# Altium PCB HT62N.PcbDoc
Units mm, origin at the board's own origin, x right, y up, seen from the top; angles counter-clockwise.
Board outline 36 x 52.5 mm, 2 copper layers (Top Layer, Bottom Layer), stack 1.571 mm thick; 34 components, 32 nets, 160 pads, 165 vias.
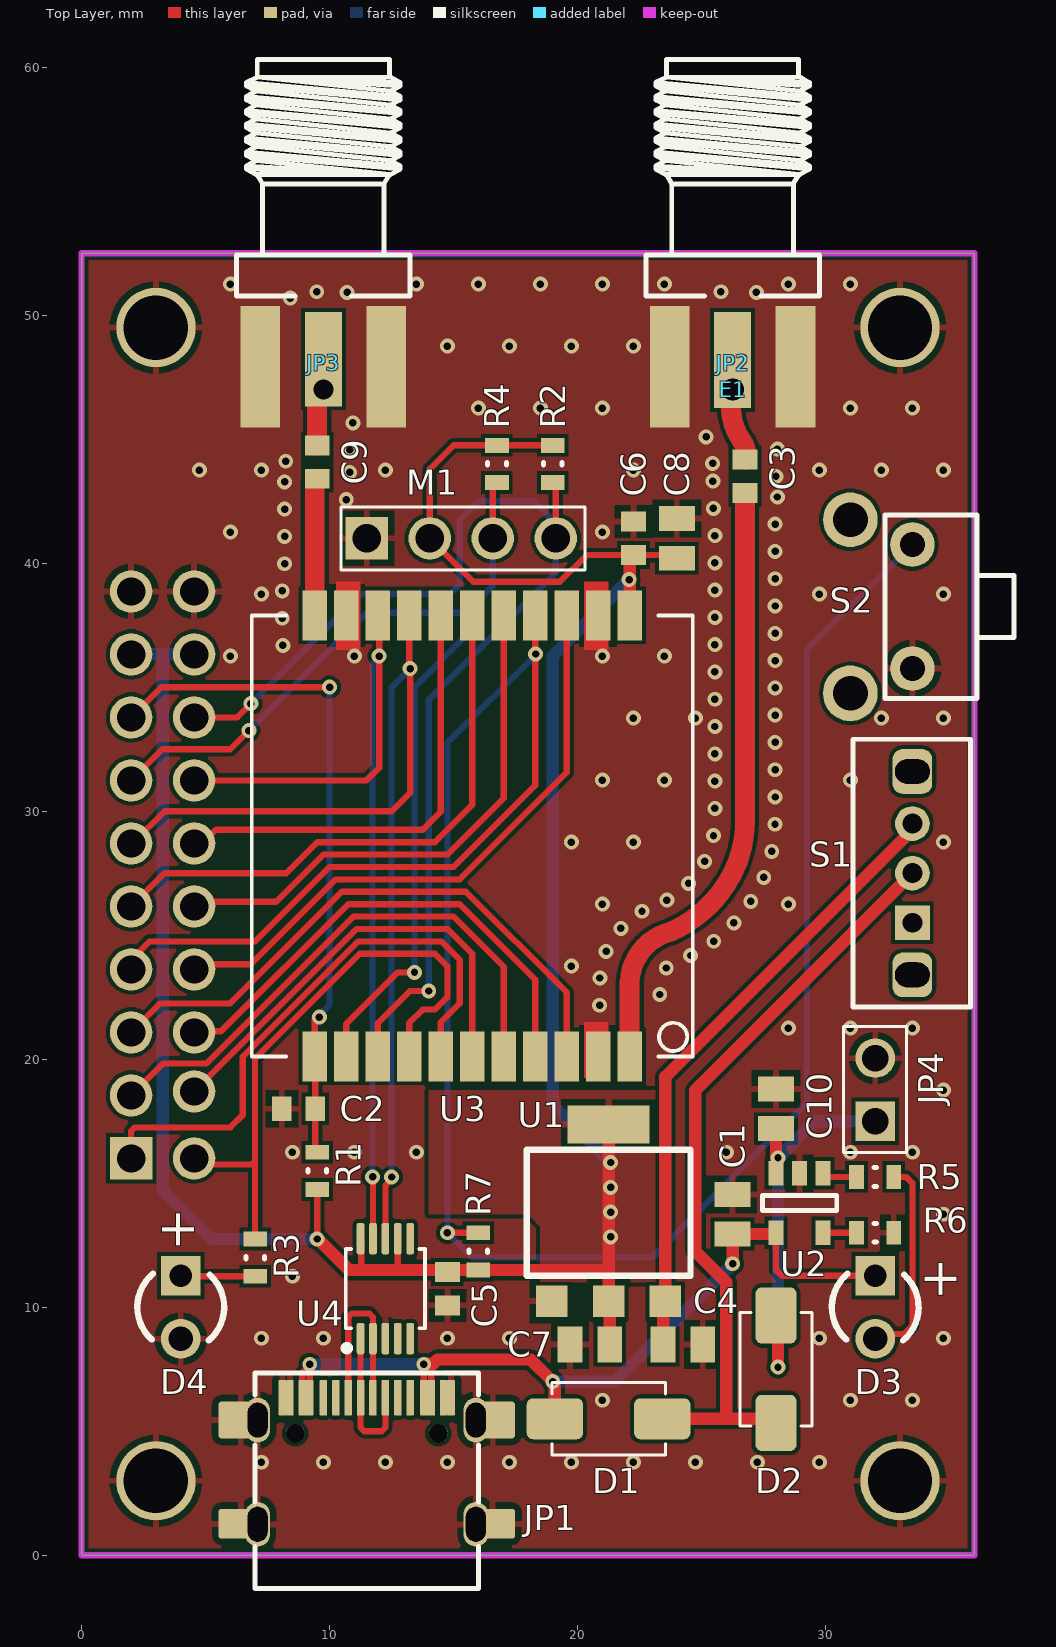
[diagram p0: Top Layer view]
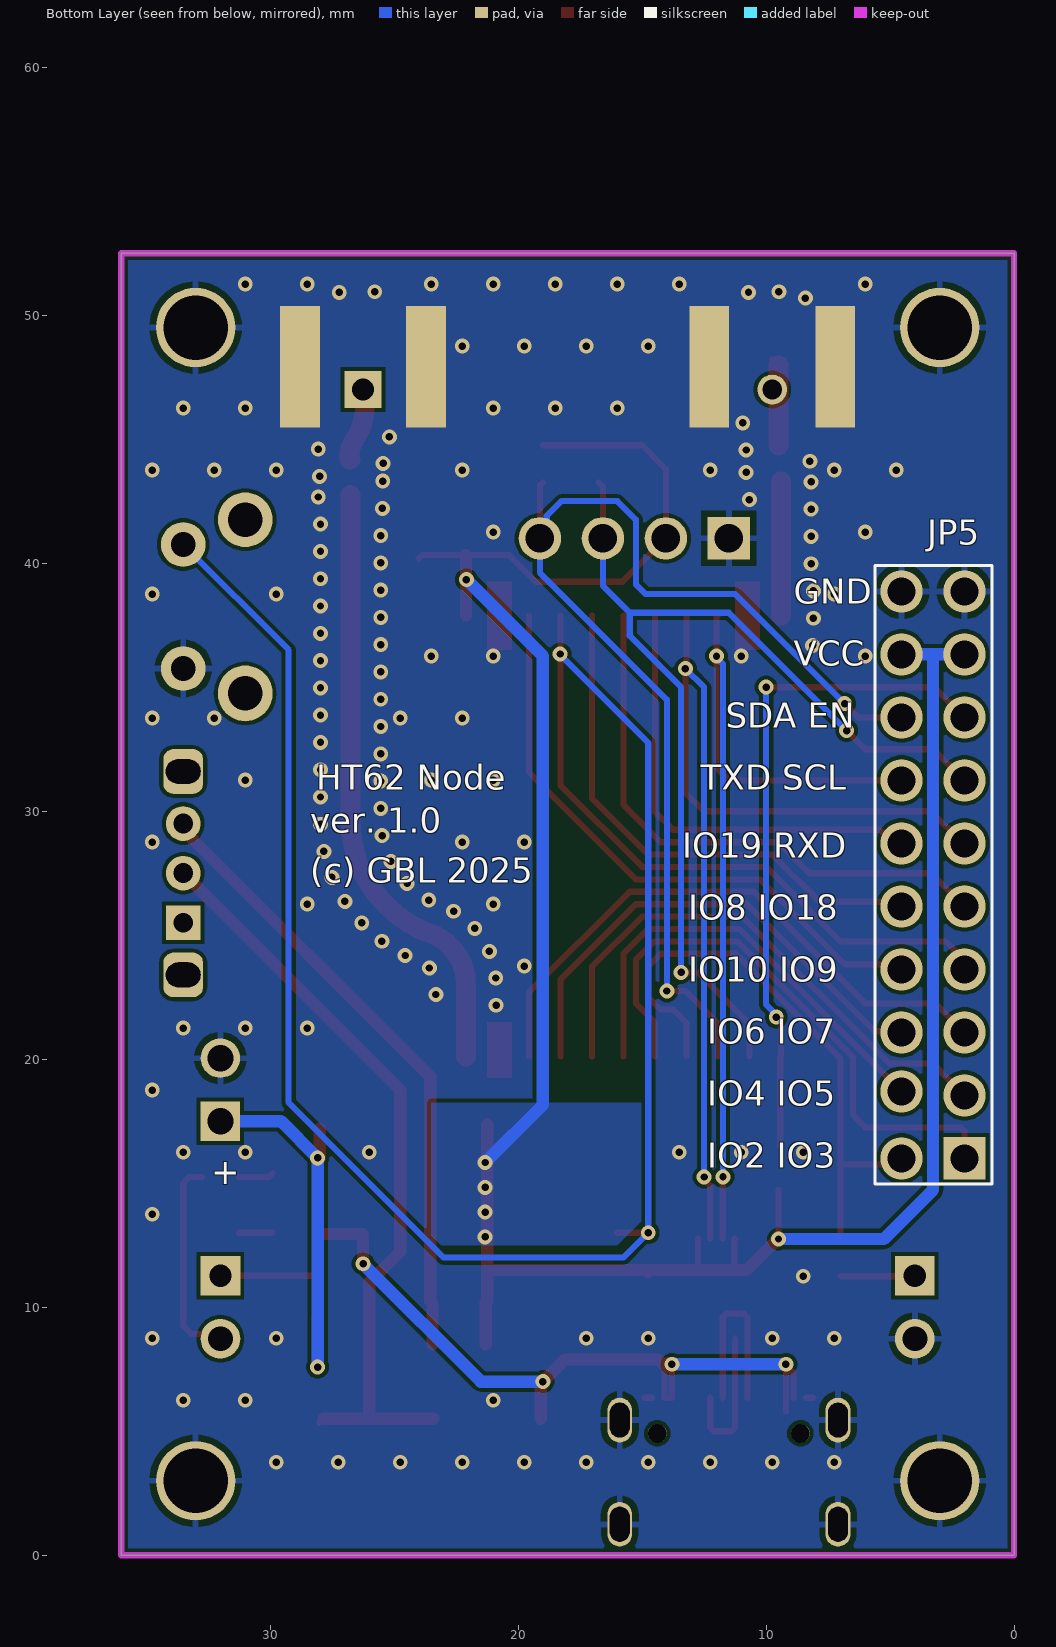
[diagram p1: Bottom Layer view, seen from below]
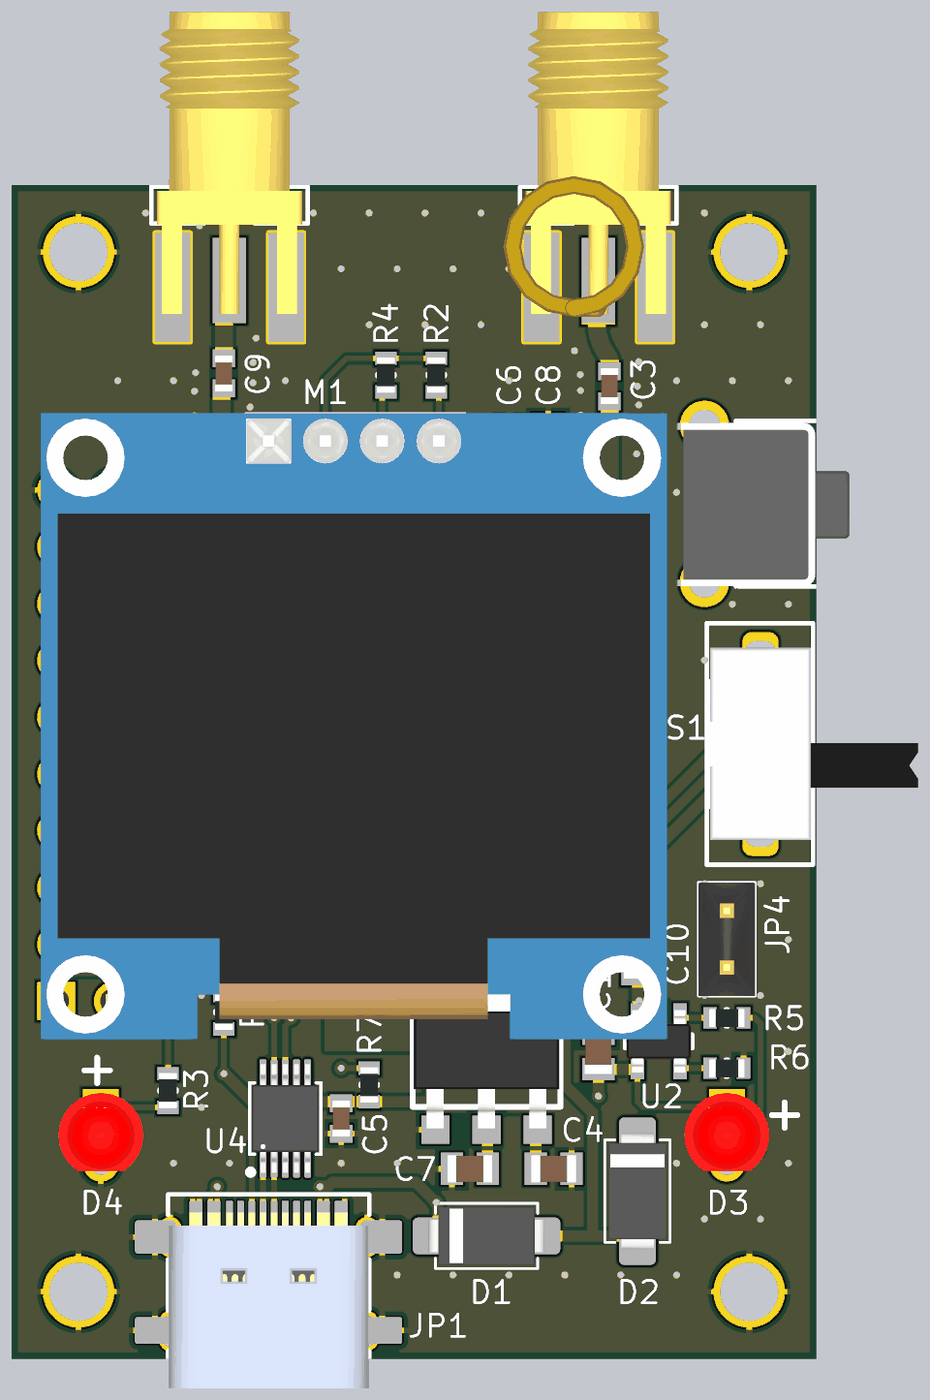
[diagram p2: 3D render of the assembled board from above, using the file's embedded part models]

## Layer stack, top to bottom
Top Solder: solder mask 0.0102, Solder Resist, Dk 3.5
Top Layer: signal copper 0.0356
Dielectric 1: dielectric 1.5, FR-4, Dk 4.8
Bottom Layer: signal copper 0.0356
Bottom Solder: solder mask 0.0102, Solder Resist, Dk 3.5

## Board outline
0,0 0,52.5 36,52.5 36,0

## Design rules (kind name [scope] priority, off if disabled: settings)
Clearance [All] p1: gap=0.15 ignorepadtopadclearanceinfootprint=FALSE
ComponentClearance ComponentClearance_1 [InComponent('JP2') vs InComponent('E1')] p1: gap=0 collisioncheckmode=3 verticalgap=0 showdistances=FALSE
ComponentClearance [All] p2: gap=0.2 collisioncheckmode=3 verticalgap=0.2 showdistances=FALSE
HoleSize [All] p1: absolutevalues=TRUE maxlimit=5 minlimit=0.25 maxpercent=80.000 minpercent=20.000
MinimumSolderMaskSliver [All] p1: minsoldermaskwidth=0.05
PlaneConnect [All] p1: pad.planeconnectstyle=Relief pad.reliefexpansion=0.5 pad.reliefentries=4 pad.reliefconductorwidth=0.25 pad.reliefairgap=0.25 via.planeconnectstyle=Direct via.reliefexpansion=0.508 via.reliefentries=4 via.reliefconductorwidth=0.254 via.reliefairgap=0.254
PolygonConnect PolygonConnect_4 [All vs IsNamedPolygon('VCC_L01_P000') Or IsNamedPolygon('VCC_L02_P001')] p1: thpad.connectstyle=Relief thpad.reliefconductorwidth=0.254 thpad.reliefentries=4 thpad.polygonreliefangle="90 Angle" thpad.airgapwidth=0.254 smdpad.connectstyle=Relief smdpad.reliefconductorwidth=0.254 smdpad.reliefentries=4 smdpad.polygonreliefangle="90 Angle" smdpad.airgapwidth=0.254 via.connectstyle=Direct via.reliefconductorwidth=0.254 via.reliefentries=4 via.polygonreliefangle="90 Angle" via.airgapwidth=0.254
PolygonConnect PolygonConnect_3 [InComponent('U1') vs IsNamedPolygon('VCC_L01_P000') Or IsNamedPolygon('VCC_L02_P001')] p2: connectstyle=Direct reliefconductorwidth=0.254 reliefentries=4 polygonreliefangle="90 Angle" airgapwidth=0.254
PolygonConnect PolygonConnect_2 [All vs InComponent('JP2') or InComponent('JP3')] p3: thpad.connectstyle=Relief thpad.reliefconductorwidth=0.254 thpad.reliefentries=4 thpad.polygonreliefangle="90 Angle" thpad.airgapwidth=0.254 smdpad.connectstyle=Direct smdpad.reliefconductorwidth=0.254 smdpad.reliefentries=4 smdpad.polygonreliefangle="90 Angle" smdpad.airgapwidth=0.254 via.connectstyle=Relief via.reliefconductorwidth=0.254 via.reliefentries=4 via.polygonreliefangle="90 Angle" via.airgapwidth=0.254
PolygonConnect PolygonConnect_1 [All vs IsNamedPolygon('GND_L01_P002') Or IsNamedPolygon('GND_L02_P003')] p4: thpad.connectstyle=Relief thpad.reliefconductorwidth=0.254 thpad.reliefentries=4 thpad.polygonreliefangle="90 Angle" thpad.airgapwidth=0.254 smdpad.connectstyle=Relief smdpad.reliefconductorwidth=0.254 smdpad.reliefentries=4 smdpad.polygonreliefangle="90 Angle" smdpad.airgapwidth=0.254 via.connectstyle=Direct via.reliefconductorwidth=0.254 via.reliefentries=4 via.polygonreliefangle="90 Angle" via.airgapwidth=0.254
PolygonConnect [All] p5: thpad.connectstyle=Relief thpad.reliefconductorwidth=0.25 thpad.reliefentries=4 thpad.polygonreliefangle="90 Angle" thpad.airgapwidth=0.25 smdpad.connectstyle=Relief smdpad.reliefconductorwidth=0.25 smdpad.reliefentries=4 smdpad.polygonreliefangle="90 Angle" smdpad.airgapwidth=0.25 via.connectstyle=Direct via.reliefconductorwidth=0.254 via.reliefentries=4 via.polygonreliefangle="90 Angle" via.airgapwidth=0.254
RoutingVias [All] p1: holewidth=0.711 width=1.27 viastyle="Through Hole" minholewidth=0.711 minwidth=1.27 maxholewidth=0.711 maxwidth=1.27
SilkToSilkClearance [All] p1: silktosilkclearance=0.05
SilkToSolderMaskClearance [IsPad] p1: minsilkscreentomaskgap=0.025 clearancetoexposedcopper=TRUE
SolderMaskExpansion SolderMaskExpansion_1 [IsVia] p1: expansion=0.102 istentingtop=TRUE useseparateexpansions=TRUE expansionbottom=0.102 istentingbottom=TRUE
SolderMaskExpansion [All] p2: expansion=0.1 istentingtop=FALSE
Width [All] p1: maxlimit=3 minlimit=0.15 preferedwidth=0.25
24 further rules are at their usual default settings.

## Components (designator, comment, footprint, x,y, rotation, side; value= is the part's Value field where it differs from the comment)
C1 "10uF" C-0805 26.25,13.75 r270 top
C2 "100nF" C-0603 8.75,18 r0 top
C3 "nc" C-0603 26.75,43.5 r270 top
C4 "10uF" C-0805 24.25,8.5 r0 top
C5 "100nF" C-0603 14.75,10.75 r90 top
C6 "100nF" C-0603 22.25,41 r270 top
C7 "10uF" C-0805 20.5,8.5 r180 top
C8 "10uF" C-0805 24,41 r90 top
C9 "100pF" C-0603 9.5,44.075 r90 top
C10 "10uF" C-0805 28,18 r270 top
D1 "DIODSH" D-SMA 21.25,5.5 r0 top
D2 "DIODSH" D-SMA 28,7.5 r270 top
D3 "DLED" LED_3mm_RED 32,10 r270 top
D4 "DLED" LED_3mm_RED 4,10 r270 top
E1 "SPRING868" ANT_H868_V 26.25,47 r270 top
JP1 "L-KLS1-5473" USB_C_SMD_SLOT 11.5,6.35 r0 top locked
JP2 "nc" SMA_F_EDGE 26.25,49.5 r270 top locked
JP3 "EM-SA071-GGT" SMA_F_EDGE 9.75,49.5 r270 top
JP4 "HEADER 2" PLS1-2 32,17.5 r90 top locked
JP5 "HEADER 10X2" PLS2_10 2,16 r90 bottom locked
M1 "OLED0_96" OLED096_I2C 11.5,41 r0 top locked
R1 "10k" R-0603 9.5,15.5 r90 top
R2 "10k" R-0603 19,44 r270 top
R3 "1k" R-0603 7,12 r90 top
R4 "10k" R-0603 16.75,44 r270 top
R5 "1k" R-0603 32,15.25 r0 top
R6 "4k7" R-0603 32,13 r180 top
R7 "10k" R-0603 16,12.25 r90 top
S1 "SW SPDT" SK-12D07VG5 33.5,27.5 r90 top
S2 "KLS7-TS3602 -3 15-180" KLS7-TS3602 33.5,38.25 r90 top
U1 "LDL1117" SOT223 21.25,13.806 r0 top
U2 "MCP73831-2ATI/OT" SOT-23-5 28.95,14.2 r270 top value={Value}
U3 "HT-CT62" HT-CT62 15.75,29 r90 top locked
U4 "CH340E" MSOP-10 12.25,10.75 r0 top value={Value}

## Footprints (in the part's own frame and the unit in brackets; to place one, negate y for a bottom-side part, rotate by r counter-clockwise, add the part's x,y. Pads: shape width x height; smd on the part's side, far side on the other; paste and mask are expansions set on the pad)
ANT_H868_V [mm] "helical 868 MHz antenna"
  rect 1.5x1.5 hole 0.9: 1(0,0)
  body extent -5.9,-4.25 0.4,2.05, height 15.4
C-0603 [mm] "Chip Capacitor, 2-Leads, Body 1,60x0,80mm, IPC Medium Density"
  rect 0.8x1 smd: 1(-0.675,0) 2(0.675,0)
  body extent -0.8,-0.4 0.8,0.4, height 0.8
C-0805 [mm] "Chip Capacitor, 2-Leads, Body 2,00x1,25mm, IPC Medium Density"
  rect 1x1.45 smd: 1(-0.8,0) 2(0.8,0)
  body extent -1,-0.62 1,0.63, height 1.25
D-SMA [mm] "Diode, Molded Body; 4.315 mm L X 2.605 mm W X 2.41 mm H body"
  rrect30% 2.27x1.65 smd: 1(-2.165,0) 2(2.165,0)
  silkscreen extent -2.29,-1.46 2.29,1.46, body extent -2.61,-1.3 2.61,1.3, height 2.41
HT-CT62 [mm]
  rect 2x1 smd: 1(-8.89,-6.35) 2(-8.89,-5.08) 3(-8.89,-3.81) 4(-8.89,-2.54) 5(-8.89,-1.27) 6(-8.89,0) 7(-8.89,1.27) 8(-8.89,2.54) 9(-8.89,3.81) 10(-8.89,5.08) 11(-8.89,6.35) 12(8.89,-6.35) 13(8.89,-5.08) 14(8.89,-3.81) 15(8.89,-2.54) 16(8.89,-1.27) 17(8.89,0) 18(8.89,1.27) 19(8.89,2.54) 20(8.89,3.81) 21(8.89,5.08) 22(8.89,6.35)
  silkscreen extent -8.89,-8.89 8.89,8.89, body extent -8.89,-8.89 8.89,8.89, height 2.8
KLS7-TS3602 [mm] "miniature switch"
  round 1.8 hole 1: 1(-2.5,0) 2(2.5,0)
  oval 2.25x2.2 hole 1.4: 3(-3.5,2.5)
  round 2.2 hole 1.4: 3(3.5,2.5)
  silkscreen extent -3.7,-4.1 3.7,1.1, body extent -3.7,-3.97 3.6,3.75, height 4.4
LED_3mm_RED [mm]
  rect 1.6x1.6 hole 0.9: 1(-1.27,0)
  round 1.6 hole 1: 2(1.27,0)
  silkscreen extent -1.34,-1.75 1.34,1.75, body extent -1.9,-1.9 1.6,1.9, height 5.75
MSOP-10 [mm] "Small Outline Pkg (SOP), 0.50 mm pitch; 10 pin, 3.00 mm L X 3.00 mm W X 1.10 mm H body"
  rrect52% 0.31x1.27 smd: 1(-1,-2.015) 2(-0.5,-2.015) 3(0,-2.015) 4(0.5,-2.015) 5(1,-2.015) 6(1,2.015) 7(0.5,2.015) 8(0,2.015) 9(-0.5,2.015) 10(-1,2.015)
  silkscreen extent -1.68,-2.52 1.6,1.6, body extent -1.5,-2.42 1.5,2.42, height 1.1
OLED096_I2C [mm] "Header, Vertical, 2.54 mm pitch; 0.70 mm lead width, 7 pins, 1 row, 7 pins per row, 16.51 mm L X 2.54 mm W X 7.54 mm H body"
  rect 1.71x1.71 hole 1.14 paste-1.71: 1(0,0)
  round 1.71 hole 1.14 paste-1.71: 2(2.54,0) 3(5.08,0) 4(7.62,0)
  silkscreen extent -1.04,-1.27 8.8,1.27, body extent -10.19,-26.7 17.81,1.3, height 7.08
PLS1-2 [mm] "Header, Vertical, 2.54 mm pitch; 0.64 mm lead width, 2 pins, 1 row, 2 pins per row, 5.08 mm L X 2.54 mm W X 8.54 mm H body"
  rect 1.59x1.59 hole 1.06 paste-1.59: 1(0,0)
  round 1.59 hole 1.06 paste-1.59: 2(2.54,0)
  silkscreen extent -1.27,-1.27 3.81,1.27, body extent -1.27,-1.27 3.81,1.27, height 8.54
PLS2_10 [mm] "Header, Vertical, 2.54 mm pitch; 0.70 mm lead width, 10 pins, 1 row, 10 pins per row, 24.13 mm L X 2.54 mm W X 7.54 mm H body"
  rect 1.71x1.71 hole 1.14 paste-1.71: 1(0,0)
  round 1.71 hole 1.14 paste-1.71: 2(0,2.54) 3(2.54,0) 4(2.7,2.54) 5(5.08,0) 6(5.08,2.54) 7(7.62,0) 8(7.62,2.54) 9(10.16,0) 10(10.16,2.54) 11(12.7,0) 12(12.7,2.54) 13(15.24,0) 14(15.24,2.54) 15(17.78,0) 16(17.78,2.54) 17(20.32,0) 18(20.32,2.54) 19(22.86,0) 20(22.86,2.54)
  silkscreen extent -1.04,-1.1 23.9,3.6, body extent -1.27,-1.27 24.13,3.81, height 8.54
R-0603 [mm] "Chip Resistor, 2-Leads, Body 1,60x0,82mm, IPC Medium Density"
  rect 0.6x0.95 smd: 1(-0.75,0) 2(0.75,0)
  silkscreen extent -0.05,-0.38 0.05,0.38, body extent -0.8,-0.4 0.8,0.4, height 0.45
SK-12D07VG5 [mm]
  rect 1.4x1.4 hole 0.8: 1(-2,0)
  round 1.4 hole 0.8: 2(0,0) 3(2,0)
  rrect50% 1.8x1.6 hole 1 slot 1.4 at 90 deg: S1(-4.1,0) S1(4.1,0)
  silkscreen extent -5.4,-2.35 5.4,2.4, body extent -4.3,-7.05 4.3,2.3, height 4.75
SMA_F_EDGE [mm] "SMA End Launch Jack for 1.58mm PCB, 50 Ohm, Flat Tab Contact"
  rect 3.81x1.5 smd: 1(1.27,0)
  rect 4.9x1.6 smd: 2(1.575,2.54) 2(1.575,-2.54)
  rect 4.9x1.6 smd far side: 2(1.575,2.54) 2(1.575,-2.54)
  silkscreen extent -10.81,-3.5 -1.28,3.5, body extent -10.73,-3.25 2.77,3.25, height 3.7
SOT223 [mil]
  rect 50x50 smd: 1(-90,-140) 2(0,-140) 3(90,-140)
  rect 130x60 smd: 4(0,140)
  silkscreen extent -130,-100 130,100, body extent -128,-138 128,138, height 67
SOT-23-5 [mm] "SOT23, 5-Leads, Body 2,90x2,45mm, Pitch 0,95mm, IPC Medium Density"
  rect 1x0.6 smd: 1(-1.2,0.95) 2(-1.2,0) 3(-1.2,-0.95) 4(1.2,-0.95) 5(1.2,0.95)
  silkscreen extent -0.3,-1.5 0.3,1.5, body extent -1.4,-1.45 1.4,1.45, height 1.55
USB_C_SMD_SLOT [mm] "USB 3.1 Type C"
  rrect20% 1.8x1.2 smd mask+0.07: 1(-5.08,-5.08) 1(5.08,-5.08)
  rrect20% 1.8x1.5 smd mask+0.07: 1(-5.08,-0.9) 1(5.08,-0.9)
  oval 1x1.8 hole 0.8 slot 1.4 at 90 deg: 1(-4.4,-5.1) 1(-4.4,-0.9) 1(4.4,-5.1) 1(4.4,-0.9)
  rrect30% 0.3x1.45 smd paste-2 mask+0.07: A1(-3.1,0) A4(-2.6,0) A9(2.6,0) A12(3.4,0) B1(3.1,0) B4(2.3,0) B9(-2.3,0) B12(-3.4,0)
  rrect30% 0.3x1.45 smd mask+0.07: A5(-1.25,0) A6(-0.25,0) A7(0.25,0) A8(1.25,0) B5(1.75,0) B6(0.75,0) B7(-0.75,0) B8(-1.75,0)
  round 0.75 hole 0.75 unplated paste-2 mask+0.07: MH(-2.885,-1.44) MH(2.885,-1.44)
  silkscreen extent -4.5,-7.69 4.5,1, body extent -4.47,-7.7 4.47,0.2, height 3.2

## Part data
C1 C2 C3 C4 C5 C6 C7 C8 C9 C10: library part CAPN, Voltage=50V, Вид=Конденсатор, Точність/група=NP0
E1: library part ANT, Вид=Антена, Примітки=Пряма
JP2 JP3: library part SMA, "SMA Female R/A PCB Mount", Вид=Роз'єм
M1: library part OLED0_96_I2C
R1 R2 R3 R4 R5 R6 R7: library part RES, Вид=Резистор, Точність/група=5%
S2: library part SW-1, Вид=Кнопка
U1: "LOW CURRENT ADJUSTABLE  VOLTAGE REGULATOR", Вид=Мікросхема
U2: Man#Part Num#=TPS61023DRLT, Manufacturer="Texas Instruments", Package=SOT-563, Temperature Range="-40°C ~ 125°C (TJ)", Component Type=SMD, Footprint Part=IC-package.PcbLib, IC Type=PMIC, Library Part=IC`s.SchLib, Mounting  Method=SMD, Part Number=MCP73831-2ATI/OT, Part Type=IC, Suplier 1=https://www.digikey.com.au/en/products/detail/texas-instruments/TPS61023DRLT/11310622?s=N4IgTCBcDaICoAUDKA2AjABjAZgCICUAZOEAXQF8g, URL=https://www.ti.com/general/docs/suppproductinfo.tsp?distId=10&gotoUrl=https%3A%2F%2Fwww.ti.com%2Flit%2Fgpn%2Ftps61023
D1 D2: Вид=Діод
D3 D4: Вид=Світлодіод
JP1 U4: Mounting  Method=SMD
JP4 JP5: Вид=Роз'єм
S1: Вид=Перемикач

## Free pads (board coordinates)
  round 3.2 hole 2.6: 1(3,3) 1(3,49.5) 1(33,3) 1(33,49.5)
  round 1.2 hole 0.8: 1(9.75,47)

## Via types
v1: diameter 0.6, hole 0.3, Top Layer to Bottom Layer, tented both sides, 165 vias

## Nets (pads, with @x,y where several pads share a name; then routed paths per layer and width w, separated by ;. In a path a pad name is that pad's centre, name@x,y a point inside that pad or via, vN(x,y) a via of type N, cw(c..) or ccw(c..) an arc to the next point about the centre after c; other vN are vias at no path point)
DN: JP1.A7 JP1.B7 U4.2 | length 7.6
  Top Layer w0.25: JP1.B7 10.75,9.604 10.896,9.75 11.604,9.75 11.75,9.604 U4.2 JP1.A7
DP: JP1.A6 JP1.B6 U4.1 | length 5.9
  Top Layer w0.25: U4.1 JP1.A6 11.25,5.146 11.396,5 12.104,5 12.25,5.146 JP1.B6
EN: C2.2 JP5.15 R1.2 U3.11 | length 27.3
  Top Layer w0.25: JP5.15 3.22,35 v1(10,35) ; R1.2@9.425,16.5 C2.2 9.425,20.085 U3.11 9.4,21.65 v1@9.5,21.75
  Bottom Layer w0.25: v1(9.59,21.694) 9.59,21.789 10,22.199 v1(10,35)
GND: C1.1 C2.1 C4.2 C5.1 C6.1 C7.2 C8.2 C10.1 D4.2 JP1.1 JP1.A1 JP1.A12 JP1.B1 JP1.B12 JP2.2 JP3.2 JP4.2 JP5.19 JP5.20 M1.1 pad.1@3,3 pad.1@3,49.5 pad.1@33,3 pad.1@33,49.5 R6.1 S2.1 U1.1 U2.2 U3.2 U3.13 U3.21 U4.3 | length 0.6
  Top Layer w0.25: JP1.B12 JP1.A1 ; JP1.B1 JP1.A12
  other v1: 7.25,3.75 9.75,3.75 12.25,3.75 14.75,3.75 17.25,3.75 19.75,3.75 22.25,3.75 24.75,3.75 27.25,3.75 29.75,3.75 21,6.25 31,6.25 33.5,6.25 7.25,8.75 9.75,8.75 14.75,8.75 17.25,8.75 29.75,8.75 34.75,8.75 8.5,11.25 34.75,13.75 8.5,16.25 11,16.25 13.5,16.25 26,16.25 31,16.25 33.5,16.25 34.75,18.75 28.5,21.25 31,21.25 33.5,21.25 20.885,22.174 23.315,22.608 20.9,23.274 23.574,23.677 19.75,23.75 24.552,24.179 21.153,24.345 25.489,24.756 21.744,25.273 26.304,25.494 22.598,25.965 21,26.25 28.5,26.25 26.984,26.36 23.602,26.416 24.473,27.087 27.507,27.327 25.125,27.973 27.829,28.379 19.75,28.75 22.25,28.75 34.75,28.75 25.481,29.014 27.961,29.471 25.535,30.112 27.965,30.571 25.535,31.212 21,31.25 23.5,31.25 31,31.25 27.965,31.671 25.535,32.312 27.965,32.771 25.535,33.412 22.25,33.75 24.75,33.75 32.25,33.75 34.75,33.75 27.965,33.871 25.535,34.512 27.965,34.971 25.535,35.612 27.965,36.071 6,36.25 11,36.25 21,36.25 23.5,36.25 8.121,36.681 25.535,36.712 27.965,37.171 8.093,37.78 25.535,37.812 27.965,38.271 7.25,38.75 29.75,38.75 34.75,38.75 8.093,38.88 25.535,38.912 27.965,39.371 8.185,39.976 25.535,40.012 27.965,40.471 8.185,41.076 25.535,41.112 6,41.25 21,41.25 27.965,41.571 8.185,42.176 25.473,42.211 10.674,42.564 28.057,42.667 8.185,43.276 25.454,43.311 28.001,43.497 10.807,43.656 4.75,43.75 7.25,43.75 12.25,43.75 22.25,43.75 29.75,43.75 32.25,43.75 34.75,43.75 25.443,44.02 8.234,44.108 10.807,44.562 28.054,44.596 25.185,45.089 10.94,45.654 16,46.25 18.5,46.25 21,46.25 31,46.25 33.5,46.25 14.75,48.75 17.25,48.75 19.75,48.75 22.25,48.75 8.414,50.685 10.709,50.914 27.209,50.914 9.484,50.942 25.776,50.942 6,51.25 13.5,51.25 16,51.25 18.5,51.25 21,51.25 23.5,51.25 28.5,51.25 31,51.25
IO2: JP5.2 R3.2 U3.8 | length 24.2
  Top Layer w0.25: JP5.2 4.79,15.75 6.854,15.75 7,15.896 ; R3.2 7,15.896 ; U3.8 13.21,21.46 13.75,22 14.25,22 14.75,22.5 14.75,23.75 14.25,24.25 11.221,24.25 7,20.029 7,16.5 7,15.896
IO3: JP5.1 U3.7 | length 23.4
  Top Layer w0.25: JP5.1 2,17.104 2.146,17.25 6,17.25 6.5,17.75 6.5,20.094 11.156,24.75 14.5,24.75 15.25,24 15.25,22.25 14.48,21.48 U3.7
IO4: JP5.4 U3.6 | length 18.5
  Top Layer w0.25: JP5.4 11.09,25.25 14.75,25.25 15.75,24.25 U3.6
IO5: JP5.3 U3.5 | length 22.5
  Top Layer w0.25: JP5.3 3.29,19.83 5.04,19.83 10.96,25.75 15,25.75 17.02,23.73 U3.5
IO6: JP5.6 U3.4 | length 20.3
  Top Layer w0.25: JP5.6 4.584,21.124 5.624,21.124 10.75,26.25 15.25,26.25 18.29,23.21 U3.4
IO7: JP5.5 U3.3 | length 24.2
  Top Layer w0.25: JP5.5 3.17,22.25 6,22.25 10.5,26.75 15.5,26.75 19.56,22.69 U3.3
IO8: JP5.10 U3.16 | length 21.7
  Top Layer w0.25: JP5.10 4.725,26.345 7.845,26.345 9.75,28.25 14.75,28.25 17.02,30.52 U3.16
IO9: JP5.7 R7.2 S2.2 U3.15 | length 94.3
  Top Layer w0.25: JP5.7 2,24 2.75,24.75 7,24.75 10,27.75 15,27.75 18.29,31.04 18.29,36.322 v1(18.305,36.337) ; v1(14.75,13) R7.2 ; v1@18.29,36.337 U3.15
  Bottom Layer w0.25: v1(18.305,36.337) 18.305,36.308 14.75,32.753 v1(14.75,13) 15.75,12 23,12 29.25,18.25 29.25,36.5 S2.2
IO10: JP5.8 U3.14 | length 24.6
  Top Layer w0.25: JP5.8 4.745,23.825 6.825,23.825 10.25,27.25 15.25,27.25 19.56,31.56 U3.14
IO18: JP5.9 U3.17 | length 23.1
  Top Layer w0.25: JP5.9 3.34,27.5 8.25,27.5 9.5,28.75 14.25,28.75 15.75,30.25 U3.17
IO19: JP5.12 U3.18 | length 18.4
  Top Layer w0.25: JP5.12 4.866,28.7 5.416,29.25 13.75,29.25 14.48,29.98 U3.18
NetC3_1: C3.1 E1.1 JP2.1 | length 3.7
  Top Layer w0.254: JP2.1@25.97,46.374 25.97,46.377 E1.1
  Top Layer w0.8: E1.1 26.187,46.65 ccw(c28.731,46.371) 26.644,44.89 cw(c25.991,44.428) 26.791,44.424 26.791,44.175 C3.1
NetC3_2: C3.2 U3.1 | length 24.6
  Top Layer w0.8: U3.1 22.1,23.103 cw(c24.28,23.022) 23.773,25.144 ccw(c21.615,29.902) 25.977,27.026 ccw(c22.07,29.602) 26.75,29.602 C3.2@26.75,42.75
NetC9_1: C9.1 U3.22 | length 5.6
  Top Layer w0.25: C9.1@9.4,43.3 C9.1
  Top Layer w0.8: U3.22 C9.1@9.4,43.3
NetC9_2: C9.2 JP3.1 pad.1@9.75,47 | length 3.6
  Top Layer w0.25: JP3.1@9.5,47.98 JP3.1
  Top Layer w0.8: C9.2 JP3.1@9.5,47.98
NetD1_2: D1.2 D2.2 S1.2 | length 30.8
  Top Layer w0.25: D2.2@27.835,5.5 D2.2
  Top Layer w0.5: D1.2 26,5.5 ; D2.2@27.835,5.5 26,5.5 ; S1.2 24.75,18.75 24.75,12.25 26,11 26,5.5
NetD3_2: D3.2 R5.2 | length 8.3
  Top Layer w0.25: D3.2 32.195,8.925 33.175,8.925 33.5,9.25 33.5,15 33.25,15.25 R5.2
NetD4_1: D4.1 R3.1 | length 3
  Top Layer w0.25: D4.1 4.02,11.25 R3.1
NetR5_1: R5.1 U2.1 | length 1.4
  Top Layer w0.25: U2.1 30.05,15.25 R5.1
NetR6_2: R6.2 U2.5 | length 1.4
  Top Layer w0.25: U2.5 R6.2
RXD: JP5.11 U3.19 U4.8 | length 42.7
  Top Layer w0.25: JP5.11 2.054,28.7 3.354,30 12.5,30 13.25,30.75 v1(13.25,35.75) 13.21,35.79 U3.19 ; U4.8 12.25,14.905 12.5,15.155 v1(12.5,15.25)
  Bottom Layer w0.25: v1(12.5,15.25) 12.5,35 v1(13.25,35.75)
SCL: JP5.13 M1.3 R4.2 U3.10 | length 42.9
  Top Layer w0.25: JP5.13 1.76,31.24 1.75,31.25 2.01,31.25 3.26,32.5 6,32.5 v1(6.75,33.25) ; U3.10 10.67,21.42 12.75,23.5 v1(13.425,23.5) ; M1.3 16.58,43.08 R4.2
  Bottom Layer w0.25: v1(6.75,33.25) 11.5,38 15.5,38 ; v1(13.425,23.5) 13.425,34.991 15.5,37.066 15.5,38 ; M1.3 16.58,39.08 15.5,38
SDA: JP5.16 M1.4 R2.2 U3.9 | length 47.4
  Top Layer w0.25: JP5.16 6.28,33.78 v1@6.75,34.25 ; U3.9 11.94,21.44 13.25,22.75 v1(14,22.75) ; R2.2 19.12,43.13 M1.4
  Bottom Layer w0.25: JP5.16 JP5.16@4.78,33.78 ; v1(6.831,34.333) 11.247,38.75 14.854,38.75 15.25,39.146 15.25,41.75 16,42.5 18.25,42.5 18.841,41.909 18.841,41.279 M1.4 19.12,39.62 14,34.5 v1(14,22.75)
TXD: JP5.14 U3.20 U4.9 | length 37.4
  Top Layer w0.25: JP5.14 11.49,31.24 12,31.75 v1(12,36.25) 12,37.83 U3.20 ; v1(11.736,15.257) 11.75,15.243 U4.9
  Bottom Layer w0.25: v1(11.736,15.257) 11.736,35.929 12,36.193 v1(12,36.25)
V_BATT: C10.2 D2.1 JP4.1 U2.3 | length 16.8
  Top Layer w0.25: D2.1@28,9.641 D2.1 D2.1@28.081,9.584 ; U2.3 28.04,15.44 28.04,15.977 v1(28.081,16.017)
  Top Layer w0.5: v1@28,16.017 C10.2 ; v1(28.081,7.583) D2.1@28.081,9.584
  Bottom Layer w0.25: v1@28,7.75 v1@28.081,7.831
  Bottom Layer w0.5: v1@28.081,7.831 v1(28.081,16.017) 29.563,17.5 JP4.1
V_IN: C4.1 S1.3 U1.3 | length 25.2
  Top Layer w0.25: U1.3@23.45,10.164 U1.3 ; S1.3@33.5,29.25 S1.3
  Top Layer w0.5: C4.1 U1.3@23.45,10.164 ; U1.3 23.536,19.286 S1.3@33.5,29.25
VBUS: C1.2 D1.1 D3.1 JP1.A4 JP1.A9 JP1.B4 JP1.B9 U2.4 | length 35.3
  Top Layer w0.25: JP1.A4 8.9,7.354 9.046,7.5 9.25,7.5 9.2,7.45 JP1.B9 9.2,5.814 JP1.B9@9.175,5.789 ; v1@13.8,7.45 JP1.B4 JP1.A9 14.1,7.4 v1@14,7.5 ; U2.4@27.95,12.95 U2.4 28,11.5 28.23,11.27 D3.1
  Top Layer w0.5: v1(13.8,7.7) 13.819,7.719 14.178,7.719 14.35,7.891 18.109,7.891 v1(19,7) 19,6.973 19.085,6.888 D1.1 ; v1(26.25,11.75) C1.2 U2.4@27.95,12.95
  Bottom Layer w0.5: v1(9.2,7.7) v1(13.8,7.7) ; v1(19,7) 21.5,7 v1(26.25,11.75)
VCC: C5.2 C6.2 C7.1 C8.1 JP5.17 JP5.18 M1.2 R1.1 R2.1 R4.1 R7.1 U1.2 U1.4 U3.12 U4.7 U4.10 | length 104.3
  Top Layer w0.25: R1.1 v1(9.5,12.75) 9.515,12.765 v1@9.53,12.75 ; U4.10@11.235,12.75 U4.10 11.28,12.735 11.28,11.646 ; 12.75,11.5 U4.7 ; C5.2@14.675,11.5 C5.2 ; R2.1 R4.1 15,44.75 14.04,43.79 M1.2 15.79,39.25 19.286,39.25 20.361,40.325 22.1,40.325 C6.2 23.875,40.325 C8.1 ; U1.2 U1.2@21.3,10.2
  Top Layer w0.5: v1@9.53,12.75 10.78,11.5 12.75,11.5 C5.2@14.675,11.5 ; C5.2 14.825,11.5 16.75,11.5 21.25,11.5 ; U1.2 21.25,11.5 ; U1.4 21.25,11.5 ; C7.1 U1.2@21.3,10.2 ; U3.12 C6.2@22.1,40.325
  Bottom Layer w0.5: JP5.17 3.27,36.32 ; JP5.18 3.27,36.32 ; v1(9.5,12.75) 5.25,12.75 3.27,14.73 3.27,36.32 ; v1(21.331,15.833) 19,18.164 19,36.253 v1(22.081,39.333)
  other v1: 21.331,12.833 21.331,13.833 21.331,14.833
pads on no net: JP1.A5 JP1.A8 JP1.B5 JP1.B8 JP1.MH S1.1 S1.S1 S2.3 U4.4 U4.5 U4.6

## Polygon pours and split planes (outlines as drawn)
GND on Top Layer "GND_L01_P002" (solid, remove dead copper, pour order 2): 0,0 0,52.5 36,52.5 36,0
VCC on Top Layer "VCC_L01_P000" (solid, remove dead copper, pour order 0): 14,18.75 14,13.75 18,13.75 18.5,13.25 18.5,11 23.5,11 23.5,18.75
GND on Bottom Layer "GND_L02_P003" (solid, remove dead copper, pour order 3): 0,0 0,52.5 36,52.5 36,0
VCC on Bottom Layer "VCC_L02_P001" (solid, remove dead copper, pour order 1): 14,18.25 14,13.75 14.75,13.75 16,12.5 23.5,12.5 23.5,18.25

## Keep-outs
Keep-Out Layer:
  the board outline again, w0.254

## Other copper
Top Layer:
  rectangle net VCC: 19.032,18.467 19.25,18.5
  rectangle net GND: 20.25,19.25 21.25,21.5
  rectangle net GND: 10.25,36.5 11.25,39.25
  rectangle net GND: 20.25,36.5 21.25,39.25
  pour cut-out: 26.1,44.714 26.1,42.5 27.4,42.5 27.4,42.6 27.4,44.725
  pour cut-out: 8.85,45.3 8.85,43.311 8.839,43.3 8.889,43.25 10.15,43.25 10.15,45.3

## Silkscreen, mask and mechanical layers (free items; w line width, h text height)
Bottom Overlay:
  text "GND" at 8.88,38.37 h1
  text "VCC" at 8.88,35.87 h1
  text "SDA EN" at 11.63,33.37 h1
  text "TXD SCL" at 12.63,30.87 h1
  text "HT62 Node" at 28.13,30.87 h1
  text "ver. 1.0" at 28.38,29.12 h1
  text "IO19 RXD" at 13.38,28.12 h1
  text "(c) GBL 2025" at 28.38,27.12 h1
  text "IO8 IO18" at 13.13,25.62 h1
  text "IO10 IO9" at 13.13,23.12 h1
  text "IO6 IO7" at 12.38,20.62 h1
  text "IO4 IO5" at 12.38,18.12 h1
  text "IO2 IO3" at 12.38,15.62 h1
  text "+" at 32.38,14.953 h1

## Text inside footprints (layer, text, board x,y; h text height)
D3: Top Overlay "+" at 34,12 h1.5 r270
D4: Top Overlay "+" at 3.25,14 h1.5 r270